# Altium PCB 主板-霍尔BC接地.PcbDoc (part 4 of 6)
Units mm, origin at the board's own origin, x right, y up, seen from the top; angles counter-clockwise.
Board outline 97.69 x 103.45 mm, 2 copper layers (Top Layer, Bottom Layer); 83 components, 83 nets, 266 pads, 295 vias.
Unrouted connection lines stored in the file: 11.
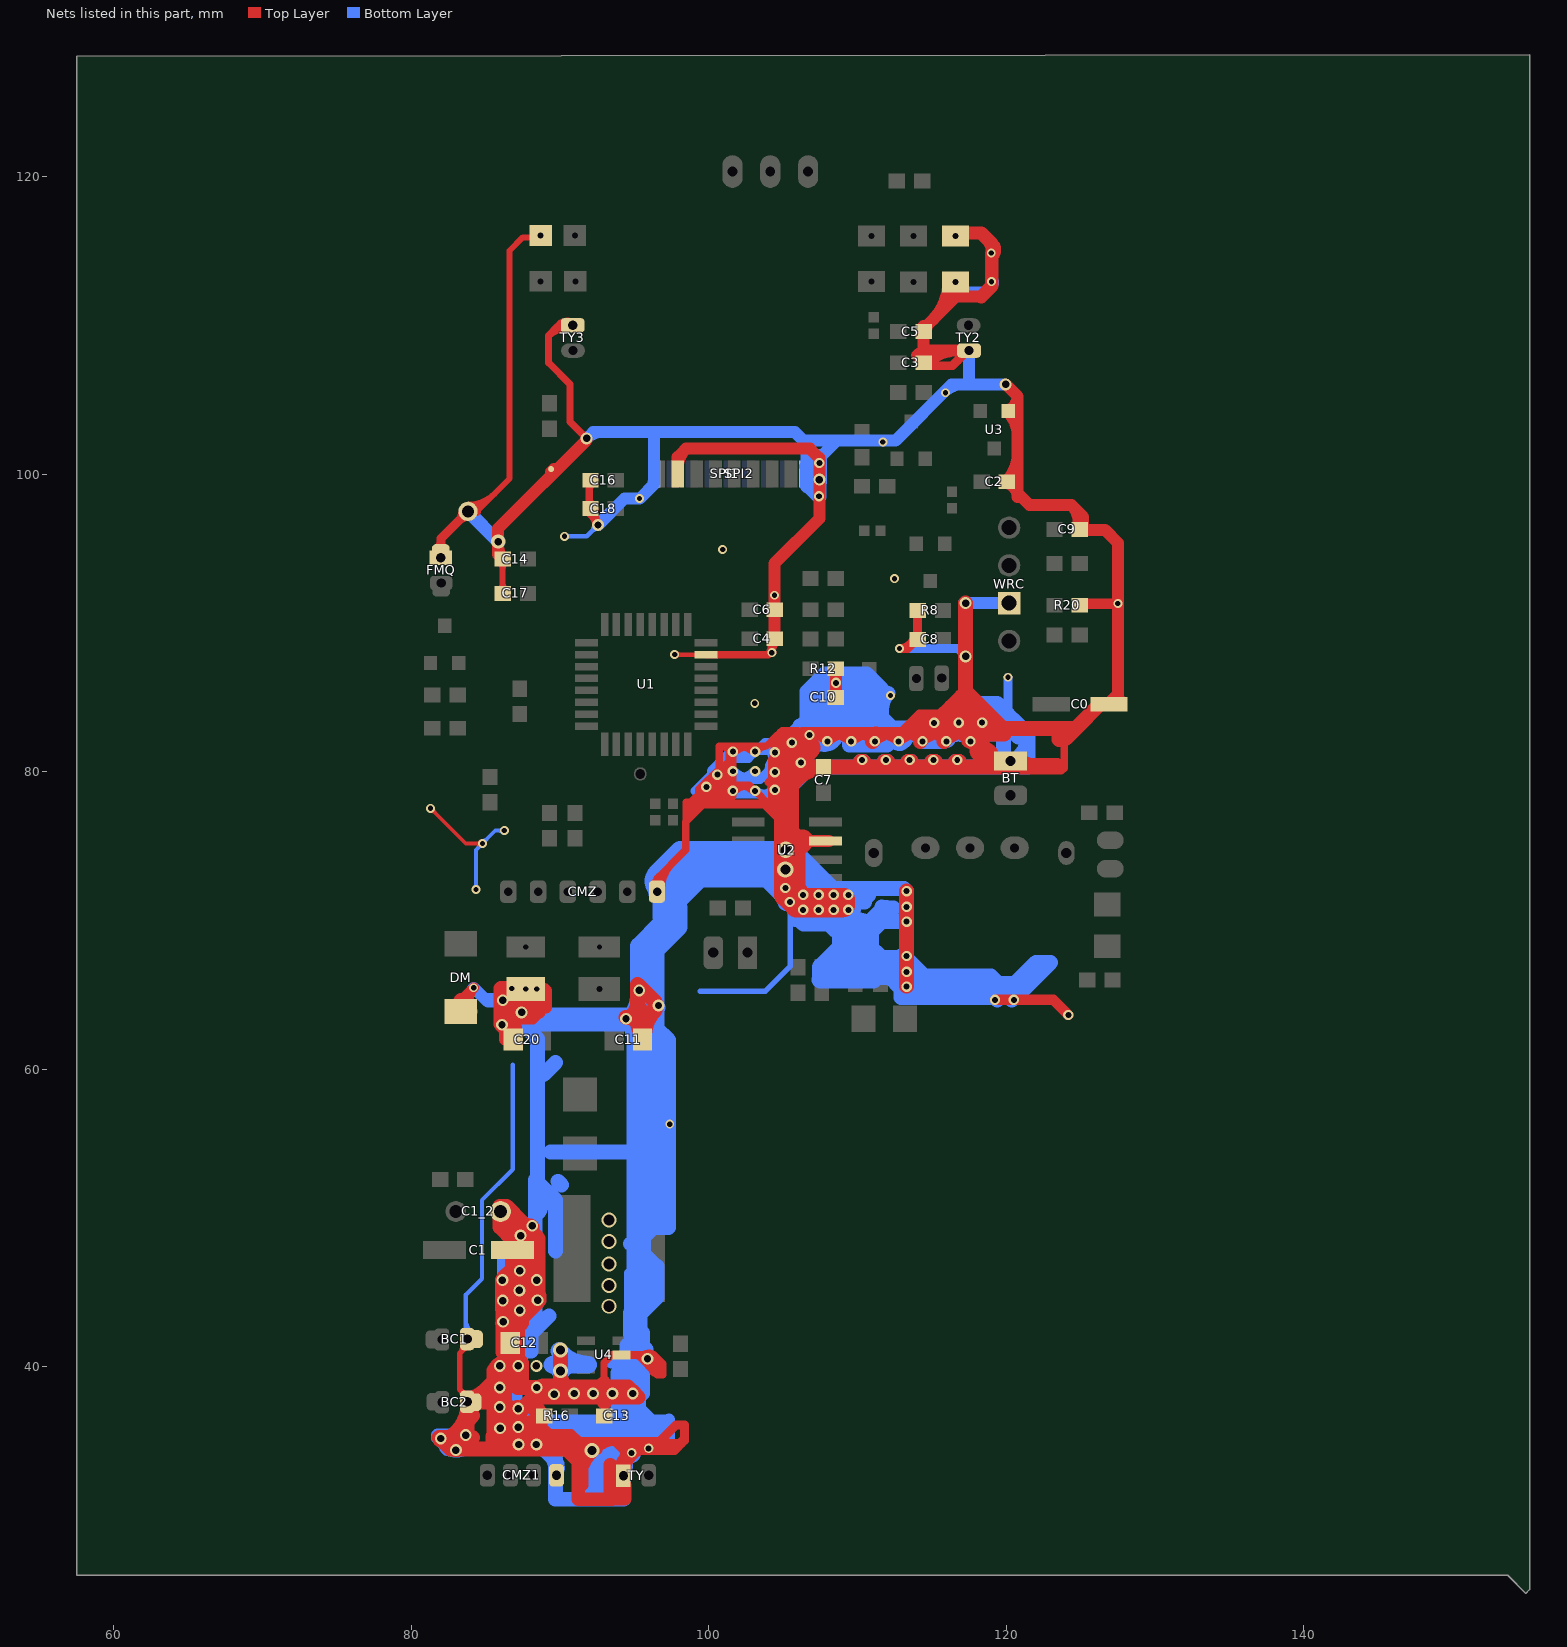
[diagram p4: the nets of this part, all layers, seen from the top]

## Via types
v1: diameter 0.6, hole 0.35, Top Layer to Bottom Layer, 117 vias
v2: diameter 0.7, hole 0.4, Top Layer to Bottom Layer, 104 vias
v3: diameter 0.8, hole 0.5, Top Layer to Bottom Layer, tented both sides, 32 vias
v4: diameter 0.8, hole 0.5, Top Layer to Bottom Layer, 15 vias
v5: diameter 1, hole 0.6, Top Layer to Bottom Layer, tented both sides, 5 vias
v6: diameter 1, hole 0.75, Top Layer to Bottom Layer, tented both sides, 5 vias
v7: diameter 3.4, hole 2.9, Top Layer to Bottom Layer, 4 vias
v8: diameter 0.65, hole 0.4, Top Layer to Bottom Layer, tented both sides, 2 vias
v9: diameter 0.8, hole 0.35, Top Layer to Bottom Layer, 2 vias
v10: diameter 0.7, hole 0.35, Top Layer to Bottom Layer, 2 vias
v11: diameter 1.1, hole 0.68, Top Layer to Bottom Layer, 2 vias
v12: diameter 0.62, hole 0.4, Top Layer to Bottom Layer, 1 vias
v13: diameter 0.95, hole 0.5, Top Layer to Bottom Layer, 1 vias
v14: diameter 0.9, hole 0.5, Top Layer to Bottom Layer, tented both sides, 1 vias
v15: diameter 0.7, hole 0.4, Top Layer to Bottom Layer, tented bottom, 1 vias
v16: diameter 0.8, hole 0.5, Top Layer to Bottom Layer, tented bottom, 1 vias

## Nets (pads, with @x,y where several pads share a name; then routed paths per layer and width w, separated by ;. In a path a pad name is that pad's centre, name@x,y a point inside that pad or via, vN(x,y) a via of type N, cw(c..) or ccw(c..) an arc to the next point about the centre after c; other vN are vias at no path point) (continued)
GND: (continued)
  Top Layer w1: v3@81.938,35.092 ccw(c82.2,35.555) 82.575,35.179 ; v3@81.988,35.079 ccw(c81.988,36.257) 82.82,35.424 ; v3@82.914,34.428 cw(c84.125,33.956) 84.125,35.255 82.652,35.255 ; 83.087,35.691 ccw(c81.405,37.373) pad.0@83.784,37.373 ; v3@83.1,34.429 ccw(c81.988,33.979) v3(81.988,35.179) 82.575,35.179 ; 83.325,35.929 ccw(c81.637,37.617) pad.0@84.025,37.617 ; DM.1@83.34,63.885 DM.1@83.34,64.62 ; v3@83.564,35.408 cw(c85.399,35.408) 84.101,36.705 ; v3@83.695,35.503 ccw(c83.374,34.533) 82.652,35.255 ; pad.0@83.764,37.893 ccw(c83.764,39.429) 84.85,38.343 ; 84.125,36.728 82.652,35.255 ; 84.693,38.186 cw(c85.954,36.926) v3@85.954,38.708 ; 85.398,37.617 cw(c85.398,36.731) v3@86.024,37.358 ; 85.479,34.899 cw(c86.945,34.899) v3@85.908,35.936 ; 85.479,35.07 cw(c86.568,35.07) v3@85.919,35.945 ; 85.547,35.064 cw(c86.78,35.064) v3@85.908,35.936 ; 85.573,35.147 cw(c86.668,35.147) v3@85.91,35.937 ; 85.573,36.605 ccw(c86.719,36.605) v3@85.908,35.794 ; 85.573,36.609 cw(c86.632,36.609) v3@85.883,37.358 ; 85.573,37.93 cw(c86.632,37.93) v3@85.883,38.679 ; 85.573,37.966 ccw(c86.632,37.966) v3@85.883,37.216 ; 85.573,39.286 ccw(c86.632,39.286) v3@85.883,38.537 ; 85.573,39.377 cw(c86.632,39.377) v3@85.883,40.127 ; 85.573,39.568 cw(c86.237,39.568) v3@85.903,40.142 ; 85.649,39.751 v3(85.954,40.056) ; 85.693,39.186 ccw(c84.823,40.056) v3@86.054,40.056 ; v3@85.854,38.608 ccw(c86.839,38.608) 86.142,37.912 ; v3@85.854,38.599 cw(c87.309,38.735) 86.276,39.768 ; v3@85.864,38.653 ccw(c86.533,38.316) 85.884,37.941 ; 85.877,37.694 85.877,37.617 85.877,35.916 85.573,35.611 ; v3@85.919,40.097 ccw(c84.516,41.5) C12.2@86.5,41.5 ; v3@86.003,40.143 cw(c85.708,39.619) 86.309,39.619 ; C1_2.1@86.013,50.242 cw(c86.141,48.321) 87.503,49.682 ; 86.02,39.325 ccw(c85.31,39.734) v3@86.043,40.1 ; v3@86.024,37.216 ccw(c85.417,37.824) 86.276,37.824 ; v3@86.024,38.537 ccw(c85.417,39.144) 86.276,39.144 ; v3@86.024,40.127 cw(c85.417,39.519) 86.276,39.519 ; v3@86.03,64.461 ccw(c89.219,64.461) C20.1@86.964,62.206 ; v3@86.047,63.073 cw(c86.374,62.625) 86.766,63.017 86.958,62.826 ; v3@86.054,37.285 ccw(c84.411,37.319) 85.573,38.481 ; v3@86.081,37.49 86.081,37.032 86.081,35.966 v3(85.979,35.865) 85.573,35.458 ; v3@86.086,63.09 cw(c86.275,62.143) 86.958,62.826 ; v3@86.12,63.091 cw(c85.981,62.124) C20.1@86.958,62.124 ; v3@86.123,63.091 cw(c86.023,62.502) 86.509,62.847 ; v3(86.131,45.822) 86.144,44.45 86.156,43.027 v3@86.157,42.977 ; 86.134,49.223 ccw(c87.351,50.44) v3@87.351,48.719 ; v3@86.138,63.087 cw(c85.753,61.945) C20.1@86.958,61.945 ; C12.2@86.157,40.996 v3@86.157,42.697 ; C12.2@86.157,41.147 ccw(c86.399,41.147) C12.2@86.299,40.926 ; v3@86.156,44.55 cw(c86.166,43.035) v3@87.237,44.106 ; v3@86.177,62.921 ccw(c84.753,64.345) 86.766,64.345 ; v3@86.181,44.547 cw(c86.043,43.993) 86.614,43.993 ; v3@86.191,62.939 ccw(c85.667,63.268) 86.27,63.405 ; C1_2.1@86.195,50.398 ccw(c86.978,50.224) 86.411,49.657 87.342,48.726 cw(c86.738,48.121) C1.1@87.554,47.869 ; C1_2.1@86.198,50.411 ccw(c88.318,50.075) 86.8,48.557 85.95,49.407 85.95,50.775 86.411,50.775 87.503,49.682 ; v3@86.199,45.748 ccw(c84.465,47.625) C1.1@87.02,47.625 ; C1_2.1@86.2,50.442 ccw(c87.586,50.442) 86.606,49.462 ; v3@86.202,45.892 cw(c85.208,44.898) 86.614,44.898 ; v3@86.208,43.282 86.208,45.974 86.8,46.566 C1.1@86.8,47.84 C1.1@86.8,48.26 ; v3@86.228,44.379 ccw(c85.294,45.312) 86.614,45.312 ; v3@86.228,64.714 cw(c84.927,63.413) 86.766,63.413 ; v3@86.276,40.234 cw(c87.916,40.234) 86.756,41.394 ccw(c87.835,40.315) 86.309,40.315 ; 86.276,40.592 cw(c85.417,40.592) 86.024,39.985 ccw(c85.337,40.673) 86.309,40.673 ; C12.2@86.276,41.437 86.276,40.454 ; C12.2@86.284,40.97 v3@86.284,42.824 ; v3@86.284,42.946 ccw(c87.896,42.946) C12.2@86.756,41.806 ; v3@86.284,43.078 v3@86.284,42.824 ; C12.2@86.309,41.529 86.309,40.488 ; v3@86.311,62.763 86.03,63.044 86.03,65.43 v10(86.766,65.43) ; 86.313,40.372 cw(c85.672,40.544) v3@86.004,39.969 ; v3@86.347,39.995 ccw(c86.814,40.503) v3@87.263,39.98 ; 86.36,35.331 86.397,35.369 ; 86.385,44.958 86.614,44.729 ; v3@86.411,42.951 v3@86.284,42.824 ; 86.43,46.196 cw(c87.3,45.326) v3@87.3,46.557 ; 86.431,63.754 86.766,63.419 86.766,65.406 87.6,65.406 pad.0@87.6,65.432 ; C12.2@86.579,41.368 cw(c86.066,40.417) v3@87.146,40.417 ; C12.2@86.593,41.839 ccw(c86.256,42.662) 87.146,42.662 ; 86.614,44.184 cw(c87.803,44.184) v3@87.226,45.223 ; 86.614,44.45 86.614,44.729 ; 86.614,45.139 ccw(c85.714,45.139) 86.184,45.907 cw(c85.269,44.413) 87.02,44.413 ; 86.614,45.339 86.614,44.729 ; 86.647,43.96 ccw(c87.3,44.613) 87.3,43.69 ccw(c87.3,45.021) 88.241,44.08 ; 86.689,36.423 86.919,36.652 ; 86.729,34.468 ccw(c86.729,35.267) v3@87.294,34.702 ; C1.1@86.729,47.769 cw(c86.026,47.066) 87.02,47.066 ; C12.2@86.739,41.821 cw(c87.596,42.977) v3@86.157,42.977 ; 86.766,63.052 cw(c87.687,63.052) v3@87.395,63.925 ; 86.766,63.629 cw(c88.971,63.629) pad.0@87.412,65.188 ; pad.0@86.766,65.183 ccw(c88.78,65.183) v3@87.356,63.759 ; C12.2@86.799,41.487 ccw(c87.993,41.385) 87.146,40.538 ; C12.2@86.8,41.5 ccw(c88.288,41.5) v3@87.236,40.448 ; C12.2@86.8,41.7 cw(c88.288,41.7) 87.236,42.752 ; C12.2@86.799,41.713 cw(c87.993,41.815) 87.146,42.662 ; C1.1@86.8,47.422 ccw(c88.265,47.422) 87.229,46.386 cw(c87.733,46.89) 87.02,46.89 ; C1.1@86.8,47.731 cw(c88.439,47.731) v3@87.28,48.89 ; C1.1@86.8,48.034 cw(c87.808,48.034) v3@87.3,48.905 ; 86.803,50.383 cw(c85.239,48.819) v3@87.451,48.819 ; C12.2@86.868,41.046 86.309,40.488 ; 86.936,34.468 85.581,34.468 ; 86.944,39.446 86.944,39.441 ; C20.1@86.958,62 86.958,62.383 86.958,62.826 ; C12.2@86.972,40.913 ccw(c86.866,41.173) C12.2@87.146,41.173 ; v3@86.982,36.055 86.276,36.762 86.276,36.836 v3@86.276,37.295 ; pad.0@86.988,65.188 cw(c85.928,64.128) v3@87.427,64.128 ; 87.02,44.764 cw(c87.646,44.764) v3@87.204,45.207 ; 87.02,45.508 ccw(c87.646,45.508) v3@87.204,45.065 ; 87.02,46.023 cw(c87.733,46.023) v3@87.229,46.527 ; C12.2@87.054,42.248 cw(c86.97,42.093) C12.2@87.146,42.093 ; v3@87.101,40.077 ccw(c88.284,39.815) 87.427,38.959 ; v3@87.102,37.211 ccw(c88.123,36.942) v3@87.376,36.195 ; 87.105,35.247 87.165,35.247 ; v3@87.12,36.003 ccw(c87.568,35.65) 87.165,35.247 ; v3@87.184,34.864 cw(c87.467,34.216) 87.82,34.828 ; v3@87.199,45.201 ccw(c87.805,44.674) v3@87.237,44.106 ; v3@87.2,43.798 ccw(c87.98,43.734) 87.427,43.18 ; v3@87.224,34.468 88.036,34.468 ; v3@87.224,34.873 cw(c87.224,34.11) 87.763,34.649 ; 87.223,36.46 cw(c86.601,36.101) v3@87.295,35.915 ; v3@87.234,37.092 cw(c86.911,37.93) v3@86.276,37.295 ; v3@87.251,48.832 ccw(c88.129,48.716) C1.1@87.503,48.09 ; v3@87.252,48.833 ccw(c88.103,48.707) C1.1@87.494,48.099 ; v3@87.26,35.152 ccw(c88.417,36.31) v3@88.417,34.673 ; v3@87.274,45.236 cw(c87.274,44.272) 87.956,44.954 ; v3@87.288,35.985 cw(c86.71,35.702) 87.165,35.247 ; v3@87.319,48.914 cw(c87.692,47.781) 88.536,48.624 ; v3@87.345,45.207 cw(c86.537,44.398) 87.68,44.398 ; v3@87.37,45.106 cw(c86.294,45.439) v3@86.294,44.313 ; v3@87.371,43.86 ccw(c86.294,42.806) v3@86.294,44.313 ; v3@87.374,43.97 v3@87.237,44.106 ; v3@87.393,43.826 cw(c86.743,43.569) 87.237,43.075 ; v3@87.393,43.825 cw(c86.374,43.434) 87.146,42.662 ; v3(87.427,63.83) pad.0@87.427,65.329 ; v3@87.45,48.829 cw(c85.965,48.68) C1.1@87.02,47.625 ; C1.1@87.503,47.244 cw(c88.246,47.244) C1.1@87.721,47.769 ; C1.1@87.503,48.436 ccw(c88.246,48.436) C1.1@87.721,47.911 ; v3@87.542,34.87 cw(c88.612,35.941) 87.098,35.941 cw(c89.248,35.941) 87.728,37.461 ; C1.1@87.579,47.769 cw(c85.27,45.46) v3@88.536,45.46 ; C1.1@87.585,47.916 ccw(c86.762,48.889) 88.036,48.889 88.036,48.641 ; C1.1@87.604,47.929 ccw(c87.234,48.641) 88.036,48.641 ; pad.0@87.612,65.41 87.617,65.406 pad.0@87.661,65.361 ; 87.68,44.856 cw(c88.815,44.856) v3@88.407,45.915 ; 87.68,44.932 cw(c88.709,44.932) v3@88.414,45.917 ; 87.744,35.827 87.49,35.573 87.427,35.509 ; 87.744,37.477 cw(c89.611,35.61) v3@89.611,38.251 ; C1.1@87.75,47.849 cw(c88.739,47.939) 88.036,48.641 ; 87.923,34.468 ccw(c87.923,35.267) v3@88.488,34.702 ; v3@88.038,49.479 ccw(c88.9,49.479) 88.291,48.869 ; v3@88.062,45.745 87.68,45.364 87.68,45.229 ; 88.308,38.042 ccw(c87.742,38.608) v3@88.543,38.608 ; v3@88.347,34.702 ccw(c88.912,35.267) 88.912,34.468 ; v3@88.348,45.855 ccw(c89.095,45.593) 88.536,45.034 ; v3@88.49,44.375 cw(c88.517,45.212) 87.68,45.212 ; v3@88.524,44.571 ccw(c88.217,43.609) 87.503,44.323 ; v3@88.536,45.785 cw(c87.697,46.112) 87.697,45.212 ; v3@88.555,44.554 ccw(c88.148,44.032) 87.68,44.5 ; v3@88.592,44.457 ccw(c87.758,44.612) 88.358,45.212 ; v3@88.591,44.497 ccw(c87.697,44.296) 87.697,45.212 ; 88.67,36.195 87.774,36.195 ; v3@88.749,38.608 cw(c88.749,37.288) v3@89.682,38.222 ; 88.91,38.643 88.875,38.608 ; 89.205,34.569 89.399,34.569 89.687,34.569 89.738,34.569 89.764,34.595 89.84,34.671 ; v3@89.69,38.213 ccw(c88.875,37.57) 88.875,38.608 ; v3@89.703,38.191 ccw(c89,37.881) 89,38.649 89.611,38.649 89.762,38.649 89.764,38.649 90.957,38.649 92.227,38.65 92.371,38.65 92.535,38.65 ; 89.764,38.647 90.957,38.647 ; 90.037,34.868 90.037,34.804 90.149,34.692 90.17,34.671 ; 90.043,39.1 v5(90.043,39.729) v5(90.043,41.123) ; 90.123,38.647 cw(c90.123,37.368) v4@91.028,38.272 ; 90.568,38.647 ccw(c90.568,37.194) v3@89.54,38.222 ; v4@90.885,38.27 cw(c91.757,37.45) 91.757,38.647 ; 91.288,34.468 90.373,34.468 90.149,34.468 90.043,34.468 89.789,34.468 89.306,34.468 88.036,34.468 ; 91.394,38.647 cw(c91.394,37.368) v4@92.298,38.272 ; v4@91.992,38.412 91.757,38.647 ; v4@92.323,38.232 ccw(c91.757,38.053) 91.757,38.647 ; 92.681,38.65 cw(c92.682,37.36) 93.593,38.272 ccw(c92.682,37.36) 92.682,38.65 ; 92.989,37.614 cw(c93.705,37.614) v4@93.493,38.297 ; v4@93.452,38.131 ccw(c93.879,38.558) 93.879,37.954 ; v4@93.507,38.103 cw(c93.604,38.71) 92.989,38.71 92.989,38.65 ; 94.052,38.65 cw(c94.052,37.359) 94.965,38.272 ccw(c94.053,37.36) 94.053,38.65 ; 94.362,38.65 ccw(c94.362,37.367) 93.452,38.272 cw(c94.362,37.367) 94.362,38.65 ; 94.538,37.954 ccw(c94.538,38.558) v4@94.965,38.131 ; 95.098,64.033 95.225,64.033 ; 95.225,63.248 ccw(c96.698,63.248) 95.656,62.206 cw(c96.207,62.757) 95.428,62.757 ; C11.2@95.402,62.125 ccw(c93.966,62.369) 94.996,63.398 95.225,63.17 ; C11.2@95.428,62.222 95.428,62.967 ; 95.431,64.033 95.225,64.033 ; C11.2@95.44,62.202 ccw(c95.039,62.578) 95.428,62.967 ; C11.2@95.651,62.211 cw(c96.516,63.17) 95.225,63.17 ; C11.2@95.7,62.11 cw(c98.08,62.27) 96.393,63.957 ; v16(95.885,40.538) 96.444,39.98 96.444,40.081 v16@95.961,40.564 ; v16@95.927,40.629 cw(c95.546,39.816) 96.444,39.816 ; v3@96.393,64.165 96.393,63.957 ; 105.588,76.124 105.588,79.121 106.782,80.315 BT.2@121.218,80.315 ; 105.825,79.358 ccw(c104.563,80.62) v2@106.347,80.62 ; 106.005,79.539 cw(c107.723,77.821) C7.1@107.723,80.25 ; 108.941,70.968 v2@109.271,70.968 ; 109.509,80.315 ccw(c109.509,81.6) v2@110.418,80.691 ; v2@110.206,80.691 ccw(c111.115,81.6) 111.115,80.315 ; v2@110.96,82.245 111.239,82.525 111.252,82.537 ; 111.109,80.315 ccw(c111.109,81.6) v2@112.018,80.691 ; v2@111.806,80.691 ccw(c112.715,81.6) 112.715,80.315 ; 112.709,80.315 ccw(c112.709,81.6) v2@113.618,80.691 ; v2@113.309,65.583 v2(113.309,66.548) v2(113.309,67.615) v2(113.309,69.926) v2(113.309,70.917) v2(113.309,71.984) ; v2@113.406,80.691 ccw(c114.315,81.6) 114.315,80.315 ; 114.309,80.315 ccw(c114.309,81.6) v2@115.218,80.691 ; 114.592,82.537 114.833,82.779 ; 114.706,82.779 115.646,83.718 116.279,84.351 116.98,85.052 117.17,84.861 117.17,84.684 ; v2@115.006,80.691 ccw(c115.915,81.6) 115.915,80.315 ; v2@115.1,83.151 ccw(c115.524,84.06) 115.867,83.117 ; v2@115.164,83.137 ccw(c115.164,84.246) 115.948,83.462 ; 115.265,82.779 116.205,83.718 116.838,84.351 ; 115.336,82.85 cw(c116.815,81.371) v2@116.815,83.462 ; 115.909,80.315 ccw(c115.909,81.6) v2@116.818,80.691 ; 116.027,82.525 116.04,82.537 116.218,82.715 v2(116.815,83.312) ; v2@116.606,80.691 ccw(c117.515,81.6) 117.515,80.315 ; v2@116.665,83.302 ccw(c117.17,83.336) 117.17,82.829 ; v2@116.684,83.239 cw(c117.496,83.693) 116.838,84.351 ; v2@116.709,83.206 ccw(c117.618,84.115) 117.618,82.829 ; v2@116.921,83.206 ccw(c116.318,83.808) 117.17,83.808 ; v2@116.921,83.418 cw(c116.318,82.816) 117.17,82.816 ; v4(117.272,91.338) 117.272,85.42 119.786,82.906 ; v2@117.468,82.11 cw(c118.643,81.51) 118.643,82.829 ; 117.586,82.829 ccw(c117.586,84.115) v2@118.495,83.206 ; v2(117.602,82.042) 118.059,82.499 ; 117.945,84.747 cw(c116.51,83.312) v2@118.539,83.312 ; v2@118.282,83.207 ccw(c119.875,84.767) 119.875,82.537 118.681,82.537 ; v2@118.285,83.205 cw(c119.457,84.404) 117.78,84.404 ; v2@118.385,83.462 cw(c118.441,81.561) 119.786,82.906 ; v2@118.495,83.418 cw(c118.138,83.061) 118.643,83.061 ; 118.497,80.315 ccw(c118.497,82.074) BT.2@119.741,80.83 ; 123.546,82.169 123.546,82.906 ; 124.003,82.245 124.663,82.906 ; 124.003,82.525 124.231,82.525 ; C0.2@126.303,84.546 124.663,82.906 ; 82.575,35.179 82.652,35.255 ; 82.652,35.255 cw(c82.162,35.744) 81.958,35.083 ccw(c82.162,35.744) 82.652,35.255 ; 82.652,35.255 81.864,35.255 82.652,34.468 85.479,34.468 ; 85.479,34.468 85.479,35.247 85.547,35.247 ; 85.479,34.468 85.547,34.468 ; 85.547,34.468 85.581,34.468 ; 85.547,34.468 85.547,35.247 ; 85.547,35.247 85.573,35.273 85.573,35.408 ; 85.547,35.247 85.581,35.247 85.581,34.468 ; 85.547,35.247 85.547,35.433 ; 85.547,35.433 85.573,35.408 ; 85.547,35.433 85.573,35.458 ; 85.573,35.408 85.573,35.458 ; 85.573,35.458 85.573,35.611 ; 85.573,35.611 85.573,37.617 ; 85.573,37.617 85.573,38.481 ; 85.573,37.617 pad.0@84.125,37.617 85.573,39.065 ; 85.573,38.481 86.276,37.778 ; 85.573,38.481 85.573,39.065 ; 85.573,39.065 ccw(c86.185,39.065) 85.908,38.519 cw(c86.185,39.065) 85.573,39.065 ; 85.573,39.065 86.276,39.768 ; 85.573,39.065 85.573,39.751 86.276,40.454 ; v3@85.908,35.936 ccw(c86.699,35.144) 85.581,35.144 cw(c86.699,35.144) v3@85.908,35.936 ; v3@85.919,35.945 ccw(c86.436,35.253) 85.573,35.253 cw(c86.436,35.253) v3@85.919,35.945 ; v3@86.004,39.969 ccw(c85.704,40.488) 86.283,40.333 ; v3@86.004,39.969 ccw(c85.704,40.488) 86.283,40.333 ; v3@86.004,39.969 ccw(c85.653,40.577) 86.331,40.396 cw(c85.653,40.577) v3@86.004,39.969 ; v3@86.004,39.969 ccw(c85.704,40.488) 86.283,40.333 ; v3@86.004,39.969 ccw(c85.704,40.488) 86.283,40.333 ; v3@86.024,37.358 cw(c85.417,36.751) 86.276,36.751 ; v3@86.024,37.358 cw(c85.417,36.751) 86.276,36.751 ; v3@86.024,37.358 cw(c85.417,36.751) 86.276,36.751 ; v3@86.024,38.679 cw(c85.417,38.072) 86.276,38.072 ; v3@86.024,38.679 cw(c85.417,38.072) 86.276,38.072 ; v3@86.024,38.679 cw(c85.417,38.072) 86.276,38.072 ; v3@86.157,42.697 ccw(c87.102,42.697) 86.712,41.837 cw(c87.102,42.697) v3@86.157,42.697 ; v3@86.157,42.697 v3@86.284,42.824 ; v3@86.157,42.697 v3@86.157,42.977 ; v3@86.276,37.295 86.919,36.652 ; v3@86.276,37.295 86.276,37.617 86.276,37.778 ; 86.276,37.778 cw(c85.523,37.778) 86.02,37.212 ccw(c85.523,37.778) 86.276,37.778 ; 86.276,37.778 86.276,39.768 ; 86.276,39.768 86.309,39.802 v3@86.309,40.03 ; 86.276,39.768 86.276,40.454 ; 86.276,40.454 ccw(c85.591,41.139) 86.508,41.452 cw(c85.591,41.139) 86.276,40.454 ; 86.276,40.454 86.309,40.488 ; v3@86.284,42.824 ccw(c87.616,42.824) 86.748,41.814 cw(c87.616,42.824) v3@86.284,42.824 ; v3@86.294,44.313 87.031,44.313 ; v3@86.294,44.313 87.237,43.37 ; v3@86.309,40.03 86.309,40.488 ; v3@86.309,40.03 86.778,39.599 86.88,39.505 86.944,39.441 ; 86.309,40.488 cw(c85.717,40.488) 86.002,39.968 ccw(c85.717,40.488) 86.309,40.488 ; 86.309,40.488 ccw(c85.676,41.12) 86.51,41.446 cw(c85.676,41.12) 86.309,40.488 ; 86.614,44.729 87.031,44.313 ; 86.919,36.652 88.875,38.608 ; 86.919,36.652 87.148,36.423 ; 86.944,39.441 87.427,38.958 ; 86.944,39.441 86.944,38.799 87.136,38.608 87.681,38.608 v3(88.443,38.608) 88.875,38.608 ; 86.944,39.684 cw(c87.57,39.684) v3@87.127,40.127 ; 86.944,39.684 cw(c87.57,39.684) v3@87.127,40.127 ; 86.944,39.684 cw(c87.57,39.684) v3@87.127,40.127 ; 86.944,39.684 cw(c87.57,39.684) v3@87.127,40.127 ; C1.1@87.02,47.625 87.02,44.729 v3@87.237,44.946 ; C1.1@87.02,47.625 C1.1@87.494,48.099 ; 87.031,44.313 ccw(c86.382,43.664) 86.129,44.546 cw(c86.382,43.664) 87.031,44.313 ; 87.031,44.313 87.237,44.313 ; 87.031,44.313 v3@87.237,44.106 ; 87.064,36.507 cw(c86.497,35.941) v3@87.298,35.941 ; 87.064,36.507 cw(c86.497,35.941) v3@87.298,35.941 ; 87.064,36.507 cw(c86.497,35.941) v3@87.298,35.941 ; v3@87.124,34.773 cw(c88.17,34.773) 87.43,35.512 ; v3@87.124,34.773 cw(c88.17,34.773) 87.43,35.512 ; v3@87.124,34.772 cw(c88.159,34.777) 87.427,35.509 ; v3@87.124,34.773 cw(c88.17,34.773) 87.43,35.512 ; v3@87.124,34.772 cw(c88.159,34.777) 87.427,35.509 ; v3@87.127,36.012 cw(c87.57,35.569) 87.57,36.195 ; v3@87.127,36.012 cw(c87.57,35.569) 87.57,36.195 ; v3@87.127,36.012 cw(c87.57,35.569) 87.57,36.195 ; 87.146,40.538 87.146,42.662 ; 87.146,40.538 87.427,40.257 87.427,38.958 ; 87.146,42.662 87.427,42.943 87.427,43.18 ; 87.148,36.423 cw(c87.576,36.851) 87.123,37.252 ccw(c87.576,36.851) 87.148,36.423 ; 87.148,36.423 v3@87.376,36.195 ; v3@87.153,34.702 ccw(c87.718,35.267) 87.718,34.468 ; v3@87.153,34.702 ccw(c87.718,35.267) 87.718,34.468 ; v3@87.153,34.702 ccw(c87.718,35.267) 87.718,34.468 ; 87.165,35.247 87.741,34.671 ; 87.165,35.247 87.427,35.509 ; 87.237,43.075 87.384,43.222 ; 87.237,43.075 87.237,43.37 ; 87.237,43.37 87.384,43.222 ; 87.237,43.37 v3@87.237,44.106 ; v3@87.237,44.106 87.237,44.313 ; 87.237,44.313 87.493,44.313 87.503,44.323 ; 87.237,44.313 v3@87.237,44.946 ; v3@87.237,44.946 v3@87.503,45.212 ; v3@87.376,36.195 87.774,36.195 ; 87.384,43.223 cw(c87.851,43.69) 87.201,43.807 ccw(c87.851,43.69) 87.384,43.223 ; 87.384,43.222 87.427,43.18 ; 87.384,43.222 v3@88.536,44.374 ; C1.1@87.494,48.099 C1.1@87.503,48.09 ; C1.1@87.494,48.099 C1.1@87.503,48.108 ; 87.503,44.323 v3@87.503,45.212 ; 87.503,44.323 87.68,44.5 ; v3@87.503,45.212 87.68,45.212 ; v3@87.503,45.212 v3@87.6,45.309 ; C1.1@87.503,48.09 87.503,45.406 v3@87.6,45.309 ; C1.1@87.503,48.09 C1.1@87.503,48.108 ; C1.1@87.503,48.108 87.503,49.682 ; C1.1@87.503,48.108 88.036,48.641 ; 87.503,49.682 88.036,49.149 88.036,49.124 88.536,48.624 ; 87.572,49.614 ccw(c88.138,50.18) v3@88.138,49.379 ; 87.572,49.614 ccw(c88.138,50.18) v3@88.138,49.379 ; 87.572,49.614 ccw(c88.138,50.18) v3@88.138,49.379 ; pad.0@87.6,65.432 87.617,65.431 87.701,65.43 87.845,65.427 pad.0@87.723,65.305 ; pad.0@87.6,65.432 87.617,65.415 87.665,65.366 pad.0@87.723,65.305 ; pad.0@87.6,65.432 87.602,65.406 87.603,65.393 87.606,65.345 87.617,65.199 pad.0@87.72,65.302 ; v3@87.6,45.309 87.68,45.229 ; pad.0@87.661,65.361 ccw(c88.142,65.842) 88.528,65.281 cw(c88.142,65.842) pad.0@87.661,65.361 ; pad.0@87.661,65.361 pad.0@87.72,65.302 ; 87.68,44.5 87.68,45.212 ; 87.68,45.212 87.697,45.212 ; 87.68,45.212 87.68,45.229 ; 87.68,45.229 87.697,45.212 ; 87.697,45.212 v3@88.536,44.374 ; 87.697,45.212 88.358,45.212 ; pad.0@87.72,65.302 ccw(c88.136,65.718) 88.548,65.298 cw(c88.136,65.718) pad.0@87.72,65.302 ; pad.0@87.72,65.302 87.96,65.062 pad.0@87.723,65.305 ; pad.0@87.72,65.302 pad.0@87.723,65.305 ; 87.741,34.671 ccw(c87.253,34.183) 87.219,34.872 cw(c87.253,34.183) 87.741,34.671 ; 87.741,34.671 87.863,34.549 88.117,34.549 88.036,34.468 ; 87.774,36.195 ccw(c87.774,37.704) R16.2@88.9,36.7 ; 88.358,45.212 88.536,45.034 ; v3@88.536,44.374 88.536,45.034 ; 88.536,45.034 88.536,48.624 ; R16.2@88.9,36.7 cw(c88.928,37.311) 88.316,37.311 88.316,37.854 ccw(c89.748,37.854) R16.2@88.9,36.7 ; v3@89.54,38.221 cw(c90.573,37.189) 90.573,38.649 ccw(c90.573,37.189) v3@89.54,38.221 ; v4@90.861,38.227 cw(c91.406,38.084) 91.406,38.647 ; v4@90.861,38.227 cw(c91.406,38.084) 91.406,38.647 ; v4@90.861,38.227 cw(c91.406,38.084) 91.406,38.647 ; v4@90.861,38.227 cw(c91.406,38.084) 91.406,38.647 ; v4@90.887,38.272 cw(c91.797,37.362) 91.797,38.65 ccw(c91.797,37.362) v4@90.887,38.272 ; v4@90.887,38.272 cw(c91.791,37.368) 91.791,38.647 ccw(c91.791,37.368) v4@90.887,38.272 ; 90.957,38.647 91.406,38.647 ; 90.957,38.647 91.406,38.647 ; 90.957,38.647 91.757,38.647 ; 91.406,38.647 cw(c91.406,37.397) 92.299,38.272 ccw(c91.406,37.397) 91.406,38.647 ; 91.406,38.647 92.227,38.647 ; 91.406,38.647 92.227,38.647 ; v4@92.131,38.226 cw(c92.676,38.087) 92.676,38.65 ; v4@92.131,38.226 cw(c92.676,38.087) 92.676,38.65 ; v4@92.131,38.226 cw(c92.676,38.087) 92.676,38.65 ; v4@92.131,38.226 cw(c92.676,38.087) 92.676,38.65 ; v4@92.15,38.265 cw(c92.964,37.597) 92.964,38.65 ; v4@92.15,38.265 cw(c92.964,37.597) 92.964,38.65 ; v4@92.15,38.265 cw(c92.964,37.597) 92.964,38.65 ; v4@92.15,38.265 cw(c92.964,37.597) 92.964,38.65 ; v4@92.152,38.267 cw(c92.989,37.543) 92.989,38.65 ; v4@92.152,38.267 cw(c92.989,37.543) 92.989,38.65 ; v4@92.152,38.267 cw(c92.99,37.542) 92.989,38.65 ; v4@92.152,38.267 cw(c92.99,37.542) 92.989,38.65 ; v4@92.157,38.131 ccw(c92.584,38.558) 92.584,37.954 ; v4@92.157,38.131 ccw(c92.584,38.558) 92.584,37.954 ; v4@92.157,38.131 ccw(c92.584,38.558) 92.584,37.954 ; 92.227,38.647 92.532,38.647 92.535,38.65 ; 92.535,38.65 92.676,38.65 ; 92.535,38.65 92.676,38.65 ; 92.676,38.65 92.964,38.65 ; 92.676,38.65 92.674,38.648 v4(92.227,38.202) 92.475,37.954 92.989,37.954 ; 92.676,38.65 92.964,38.65 ; 92.964,38.65 cw(c92.964,37.928) v4@93.613,38.246 ; 92.964,38.65 cw(c92.964,37.928) v4@93.613,38.246 ; 92.964,38.65 cw(c92.964,37.928) v4@93.613,38.246 ; 92.964,38.65 cw(c92.964,37.928) v4@93.613,38.246 ; 92.964,38.65 92.989,38.65 ; 92.964,38.65 92.989,38.65 ; 92.989,37.954 92.989,38.648 ; 92.989,37.954 93.428,37.954 95.261,37.954 94.894,38.32 94.564,38.65 ; 92.989,38.648 ccw(c93.536,38.648) 93.52,38.102 cw(c93.536,38.648) 92.989,38.648 ; 92.989,38.648 92.989,38.65 ; 92.989,38.65 cw(c92.989,37.968) v4@93.614,38.242 ; 92.989,38.65 cw(c92.989,37.968) v4@93.614,38.242 ; 92.989,38.65 cw(c92.989,37.968) v4@93.614,38.242 ; 92.989,38.65 ccw(c93.538,38.65) 93.519,38.102 cw(c93.538,38.65) 92.989,38.65 ; 92.989,38.65 cw(c92.989,37.968) v4@93.614,38.242 ; 92.989,38.65 93.074,38.65 ; 92.989,38.65 93.523,38.65 ; 93.074,38.65 cw(c93.074,38.087) 93.62,38.226 ccw(c93.074,38.087) 93.074,38.65 ; 93.074,38.65 93.076,38.648 v4(93.523,38.202) 93.675,38.202 v4(94.894,38.202) 94.446,38.65 ; 93.074,38.65 93.523,38.65 ; 93.167,37.954 ccw(c93.167,38.558) v4@93.594,38.131 ; 93.167,37.954 ccw(c93.167,38.558) v4@93.594,38.131 ; 93.167,37.954 ccw(c93.167,38.558) v4@93.594,38.131 ; v4@93.436,38.251 cw(c94.124,37.858) 94.124,38.65 ; v4@93.436,38.251 cw(c94.124,37.858) 94.124,38.65 ; v4@93.436,38.251 cw(c94.124,37.858) 94.124,38.65 ; v4@93.436,38.251 cw(c94.124,37.858) 94.124,38.65 ; 93.523,38.65 94.124,38.65 ; 93.523,38.65 94.124,38.65 ; 94.124,38.65 cw(c94.124,37.523) v4@94.969,38.268 ; 94.124,38.65 cw(c94.124,37.525) v4@94.97,38.268 ; 94.124,38.65 cw(c94.124,37.525) v4@94.97,38.268 ; 94.124,38.65 cw(c94.124,37.525) v4@94.97,38.268 ; 94.124,38.65 94.362,38.65 ; 94.124,38.65 94.362,38.65 ; 94.362,38.65 94.446,38.65 ; 94.362,38.65 94.564,38.65 ; v3@94.442,63.498 cw(c94.442,62.402) 95.217,63.177 ; v3@94.442,63.498 cw(c94.442,62.402) 95.217,63.177 ; v3@94.442,63.498 cw(c94.442,62.402) 95.217,63.177 ; 94.446,38.65 94.564,38.65 ; 95.225,63.17 cw(c94.583,62.528) 95.413,62.161 ccw(c94.583,62.528) 95.225,63.17 ; 95.225,63.17 95.428,62.967 ; 95.225,63.17 95.225,64.033 ; 95.225,63.17 95.606,63.17 96.393,63.957 ; 95.225,64.033 95.225,65.71 96.393,64.541 96.393,63.957 ; 105.308,79.198 ccw(c105.308,80.058) 105.917,79.45 ; 105.308,79.198 ccw(c105.308,80.058) 105.917,79.45 ; 105.308,79.198 ccw(c105.308,80.058) 105.917,79.45 ; 105.321,79.2 ccw(c105.061,80.171) 105.932,79.668 ; 105.321,79.2 ccw(c105.061,80.171) 105.932,79.668 ; 105.321,79.2 ccw(c105.061,80.171) 105.932,79.668 ; 105.321,79.2 ccw(c105.061,80.171) 105.932,79.668 ; 105.321,79.2 ccw(c105.061,80.171) 105.932,79.668 ; 105.321,79.2 ccw(c105.061,80.171) 105.932,79.668 ; 105.344,79.283 cw(c104.755,78.694) 105.588,78.694 ; 105.344,79.283 cw(c104.755,78.694) 105.588,78.694 ; 105.344,79.283 cw(c104.755,78.694) 105.588,78.694 ; v2@111.025,82.042 cw(c111.673,82.042) 111.215,82.5 ; v2@111.025,82.042 cw(c111.673,82.042) 111.215,82.5 ; v2@111.025,82.042 cw(c111.673,82.042) 111.215,82.5 ; v2@115.825,82.042 cw(c116.503,82.042) 116.024,82.521 ; v2@115.825,82.042 cw(c116.503,82.042) 116.024,82.521 ; v2@115.825,82.042 cw(c116.503,82.042) 116.024,82.521 ; v2@115.825,82.042 cw(c116.503,82.042) 116.024,82.521 ; v2@115.825,82.042 cw(c116.503,82.042) 116.024,82.521 ; v2@115.825,82.042 cw(c116.503,82.042) 116.024,82.521 ; 116.838,84.351 117.17,84.684 ; 117.17,82.829 118.643,82.829 ; 117.17,82.829 117.17,83.795 ; 117.17,83.795 cw(c116.351,83.795) 116.919,83.204 ccw(c116.351,83.795) 117.17,83.795 ; 117.17,83.795 117.17,84.684 ; 117.17,83.795 117.78,84.404 ; 117.78,84.404 117.78,83.337 118.529,83.337 118.643,83.223 118.643,82.829 ; 119.786,82.906 123.546,82.906 ; 123.546,82.906 124.384,82.906 124.663,82.906 ; 85.547,35.111 cw(c86.669,35.111) 85.911,35.939 ccw(c86.669,35.111) 85.547,35.111 ; 85.547,35.254 cw(c86.375,35.254) 85.925,35.949 ccw(c86.375,35.254) 85.547,35.254 ; 85.573,35.29 cw(c86.365,35.29) 85.923,35.948 ccw(c86.365,35.29) 85.573,35.29 ; 85.573,35.386 cw(c86.201,35.386) 85.937,35.956 ccw(c86.201,35.386) 85.573,35.386 ; 85.573,38.206 cw(c86.1,38.206) 85.919,38.702 ccw(c86.1,38.206) 85.573,38.206 ; v3@86.012,40.137 cw(c85.645,39.624) 86.276,39.624 ccw(c85.645,39.624) v3@86.012,40.137 ; 86.276,40.389 cw(c87.565,40.389) 86.745,41.384 ccw(c87.565,40.389) 86.276,40.389 ; 86.309,40.432 cw(c87.567,40.432) 86.748,41.386 ccw(c87.567,40.432) 86.309,40.432 ; 86.614,44.36 cw(c87.531,44.36) 87.243,45.231 ccw(c87.531,44.36) 86.614,44.36 ; v3@87.371,43.719 ccw(c86.623,44.466) 87.68,44.466 cw(c86.623,44.466) v3@87.371,43.719 ; pad.0@87.654,65.376 ccw(c88.148,65.858) 88.525,65.279 cw(c88.148,65.858) pad.0@87.654,65.376 ; pad.0@87.713,65.316 ccw(c88.14,65.732) 88.545,65.295 cw(c88.14,65.732) pad.0@87.713,65.316 ; v4@92.157,38.272 cw(c93.069,37.36) 93.069,38.65 ccw(c93.068,37.361) v4@92.157,38.272 ; v2@106.091,80.514 ccw(c106.571,80.993) 106.571,80.315 cw(c106.571,80.993) v2@106.091,80.514 ; v2@108.301,70.82 cw(c108.658,70.463) 108.658,70.968 ccw(c108.658,70.463) v2@108.301,70.82 ; v2@114.225,82.042 cw(c114.842,82.042) 114.406,82.478 ccw(c114.842,82.042) v2@114.225,82.042
  Top Layer w1.5: 105.156,71.704 105.893,70.968 108.941,70.968 ; v2@105.156,71.933 105.131,71.958 105.131,73.483 105.131,73.575 105.131,79.959 106.782,81.61 ; v11@105.297,73.29 ccw(c104.205,74.383) 105.75,74.383 ; v11@105.297,73.573 cw(c104.205,72.48) 105.75,72.48 ; v11@105.323,74.894 cw(c104.292,73.862) 105.75,73.862 ; 106.304,75.357 105.75,74.803 105.75,74.762 105.75,72.101 105.918,71.933 105.918,71.425 109.093,71.425 109.093,70.993 108.788,70.993 ; 118.285,81.407 118.407,81.407 118.75,81.153
  Bottom Layer w0.254: v1@84.231,72.208 ccw(c83.936,72.503) 84.353,72.503 ccw(c84.771,72.503) v1@84.476,72.208 ; v1(84.353,72.085) 84.353,74.752 85.649,76.048 v1(86.258,76.048) ; v1@84.612,75.184 cw(c84.195,75.184) 84.49,74.889 cw(c84.785,74.593) v1@84.785,75.011 ; v1@84.785,75.357 ccw(c84.785,75.775) 85.081,75.479 ccw(c85.376,75.184) v1@84.958,75.184 ; v1@86.136,75.925 ccw(c85.841,75.63) 85.841,76.048 ccw(c85.841,76.465) v1@86.136,76.17
  Bottom Layer w0.3: BC1.1@83.531,42.363 ccw(c83.209,42.684) 83.664,42.684 ; BC1.1@83.664,41.859 83.664,44.827 84.76,45.923 84.76,51.206 86.82,53.266 86.82,60.312 ; 83.664,43.167 ccw(c84.802,43.167) BC1.1@83.997,42.363 ; v1(90.297,95.834) 91.796,95.834 v4(92.558,96.596) ; v1@90.403,95.728 cw(c90.659,95.472) 90.659,95.834 cw(c90.659,96.196) v1@90.403,95.94 ; v4@92.308,96.596 cw(c91.704,96.596) 92.131,96.169 cw(c92.558,95.743) v4@92.558,96.346
  Bottom Layer w0.36: 99.441,65.253 103.812,65.253 105.479,66.92 v2@105.479,71.037 ; v2@105.341,71.127 cw(c105.006,70.793) 105.479,70.793 ; 105.479,70.881 cw(c105.827,70.881) v2@105.581,71.127
  Bottom Layer w0.4: SPI2.8@106.375,100.223 106.375,102.273 ; 106.375,101.327 ccw(c107.31,101.327) SPI2.8@106.649,100.666
  Bottom Layer w0.6: 94.615,41.395 94.615,46.304 ; 99.411,78.715 99.614,78.511 100.203,78.511 ; 99.805,79.434 cw(c100.584,78.655) v2@100.584,79.757 ; v2@99.838,78.945 ccw(c99.678,78.122) 99.085,78.715 99.365,78.994 ; v2(99.847,78.994) v2@99.72,78.994 ; v2@99.883,79.029 ccw(c101.133,80.28) 101.133,78.511 ; v2@99.897,79 cw(c100.879,79.111) 100.18,79.809 ; v2@100.619,79.842 ccw(c101.52,80.742) 101.52,79.469 ; 100.905,80.461 ccw(c101.559,79.807) 100.634,79.807 cw(c102.349,79.807) 101.136,81.02 ; 101.018,78.511 ccw(c101.018,79.326) v2@101.594,78.75 ; 101.215,80.64 cw(c101.95,80.64) v2@101.65,81.311 ; 101.215,80.74 cw(c101.807,80.74) v2@101.643,81.308 ; 101.277,81.16 cw(c101.629,80.808) v2@101.629,81.306 ; v2@101.58,80.045 cw(c100.922,80.133) 100.922,79.469 ; 101.63,79.469 ccw(c101.63,81.532) v2@103.089,80.074 ; v2@101.665,78.75 ccw(c102.24,79.326) 102.24,78.511 ; v2@101.665,80.074 ccw(c103.123,81.532) 103.123,79.469 ; v2@101.665,81.321 cw(c102.129,80.856) 102.129,81.513 ; v2@101.669,81.387 ccw(c102.667,82.164) 102.667,80.899 ; 101.9,80.899 ccw(c101.9,82.581) v2@103.089,81.392 ; 102.513,78.511 ccw(c102.513,79.326) v2@103.089,78.75 ; 102.624,81.513 cw(c102.624,80.856) v2@103.089,81.321 ; v2@103.159,78.75 ccw(c103.735,79.326) 103.735,78.511 ; 103.536,79.558 cw(c104.445,78.649) v2@104.445,79.935 ; 103.65,78.511 ccw(c103.65,79.586) v2@104.409,78.826 ; 104.036,81.425 cw(c104.036,80.896) v2@104.41,81.27 ; 104.127,81.954 cw(c103.478,81.305) v2@104.395,81.305 ; v2@104.421,79.941 ccw(c104.183,79.51) 103.835,79.858 103.447,79.469 100.922,79.469 ; v2@104.48,78.826 ccw(c105.232,79.567) 105.232,78.511 100.203,78.511 ; v1(112.827,88.29) 116.738,88.29 v4(117.272,87.757) ; 117.907,83.287 117.717,83.476 ; v2@118.369,83.358 cw(c118.129,83.888) 117.717,83.476 ; v2@118.425,83.277 cw(c119.859,81.842) 119.859,83.871 ; v1(120.117,86.36) 120.117,83.871 ; 120.244,83.312 120.117,83.439 120.117,83.871 ; 99.365,78.994 v2@99.72,78.994 ; 99.365,78.994 100.18,79.809 ; v2@99.72,78.994 100.203,78.511 ; 100.18,79.809 100.18,80.063 101.63,81.513 103.33,81.513 103.782,81.966 104.115,81.966 104.445,81.636 104.234,81.425 103.193,81.425 v2(103.124,81.356) 102.667,80.899 ; 100.922,79.469 v2(100.584,79.807) 100.584,80.14 101.215,80.772 101.215,80.899 102.667,80.899 ; 117.717,83.476 117.717,84.162 118.008,83.871 120.117,83.871
  Bottom Layer w0.8: v1(84.201,65.481) 85.039,64.643 ; v3(85.954,38.608) cw(c86.552,38.347) 86.552,39 ; v3@86.055,35.865 87.097,34.823 88.773,34.823 88.925,34.823 ; 86.055,39 86.552,39 ; 86.081,65.303 86.131,65.354 87.621,65.354 ccw(c87.621,63.491) v3(86.157,64.643) ; pad.0@86.537,64.937 ccw(c86.088,65.517) pad.0@86.816,65.424 ; 86.614,38.938 86.552,39 ; 86.614,63.833 87.602,63.833 v3@87.617,63.817 ; 86.624,63.516 cw(c87.751,64.643) v3(86.157,64.643) ; 87.071,63.068 86.203,63.936 ; v3(87.427,63.83) cw(c86.878,64.611) 86.203,63.936 ; 87.6,62.944 90.38,62.944 cw(c90.38,65.29) 88.511,63.87 ; pad.0@88.287,65.194 88.049,65.432 pad.0@87.6,65.432 ; pad.0@88.393,65.405 ccw(c90.242,65.405) 88.934,64.097 ; pad.0@88.472,65.365 cw(c88.075,65.907) pad.0@87.6,65.432 ; pad.0@88.6,65.399 ccw(c90.914,65.39) 89.278,63.754 ; 88.889,64.143 cw(c88.521,63.774) 89.041,63.752 ; 89.484,63.5 89.84,63.144 ; v4(92.558,96.596) 94.336,98.374 v1(95.352,98.374) 96.33,99.353 pad.0@96.33,100.032 96.33,102.845 ; 92.838,102.845 ccw(c92.838,101.37) v4(91.796,102.413) 92.227,102.845 96.33,102.845 ; 93.584,63.754 cw(c93.584,62.54) v3(94.442,63.398) cw(c95.3,62.54) 95.3,63.754 ; 94.64,42.164 94.64,43.637 ; v8@94.765,34.267 cw(c95.373,33.659) 95.373,34.519 ; v8@94.889,34.24 ccw(c94.488,34.091) 94.488,34.519 94.818,34.519 95.214,34.519 ; 95.326,63.754 89.278,63.754 ; 95.656,66.345 95.656,66.712 ; pad.0@96.143,99.166 ccw(c95.752,99.557) pad.0@96.305,99.557 ; 96.418,63.805 95.555,63.805 ccw(c95.555,65.236) v3(96.626,64.287) ; 97.18,36.297 97.333,36.449 97.333,34.9 97.18,34.747 96.952,34.519 v8(95.961,34.519) 95.214,34.519 ; SPI2.8@106.472,100.524 ccw(c105.603,101.394) 106.832,101.394 ; SPI2.8@106.473,100.526 ccw(c105.772,101.321) 106.832,101.321 ; SPI2.8@106.515,100.504 cw(c107.442,100.386) 107.442,101.321 106.832,101.321 ; v2@107.392,100.762 cw(c108.068,100.762) 107.59,101.24 ; v4@107.417,99.593 v2@107.417,100.533 ; v2@107.442,101.092 108.623,102.273 106.375,102.273 ; v2@107.491,100.771 ccw(c106.832,100.651) 106.832,101.321 ; 108.153,71.145 108.179,71.12 108.382,70.917 cw(c108.811,71.346) v2@108.371,71.764 ; 108.648,102.273 112.56,102.273 116.332,106.045 v4(119.964,106.045) ; v1@115.855,105.557 cw(c117.033,104.379) 117.033,106.045 ; pad.0@116.388,112.72 cw(c115.876,112.208) 116.6,112.208 cw(c117.324,112.208) pad.0@116.812,112.72 ; pad.0@116.6,112.932 116.6,111.924 116.919,112.243 118.593,112.243 118.999,112.649 v1(118.999,114.884) ; v4@117.17,91.345 WRC.2@120.2,91.345 ; 117.501,106.045 TY2.2@117.501,108.319 ; 118.998,112.648 ccw(c118.691,112.954) v1@119.124,112.954 ; 119.343,91.345 cw(c119.343,90.483) WRC.2@119.953,91.093 ; 119.367,91.345 ccw(c119.367,92.173) WRC.2@119.953,91.588 ; v3(86.157,64.643) ccw(c86.583,64.316) 86.203,63.936 ; pad.0@87.6,65.432 89.278,63.754 ; 95.152,63.805 ccw(c95.152,64.476) 95.656,64.033 ; 95.152,63.805 ccw(c95.152,64.476) 95.656,64.033 ; 95.152,63.805 ccw(c95.152,64.476) 95.656,64.033 ; 95.214,34.519 ccw(c95.214,33.989) 94.753,34.251 cw(c95.214,33.989) 95.214,34.519 ; 96.33,102.845 105.804,102.845 106.375,102.273 ; 106.375,102.273 106.832,101.816 106.832,101.321
  Bottom Layer w0.9: v3@81.952,35.214 cw(c82.419,34.748) 82.419,35.408 ; v3@81.988,35.229 cw(c81.988,33.931) 82.906,34.849 ; v3@82.016,35.22 cw(c81.492,34.45) 82.423,34.45 ; v3@82.018,35.219 cw(c81.52,34.575) 82.334,34.575 ; 82.841,34.913 cw(c82.319,34.392) v3@83.057,34.392 ; v3@82.985,34.347 cw(c83.524,35.408) 82.334,35.408 ; v3@82.987,34.346 cw(c83.358,35.204) 82.423,35.204 82.423,34.595 ; v3@83.005,34.342 ccw(c83.042,35.22) 83.664,34.598 ; v3@83.028,34.346 ccw(c82.562,35.378) v3@83.694,35.378 ; 83.536,34.979 ccw(c83.108,35.408) v3@83.714,35.408 ; v3@83.711,35.424 cw(c82.798,35.102) 83.483,34.417 ; pad.4@83.82,97.511 v13(85.852,95.479) ; 86.652,36.386 87.046,36.779 87.046,39.656 ; 92.903,31.09 92.954,31.14 93.505,31.691 ; 93.484,40.322 93.841,40.322 ; v4@93.558,38.166 ccw(c92.875,38.85) 93.841,38.85 ; v4@93.558,38.237 cw(c92.875,37.554) 93.841,37.554 ; 93.841,39.599 93.841,37.009 94.742,36.108 ; 94.092,36.108 94.714,35.486 96.314,35.486 96.441,35.486 97.18,34.747 95.442,34.747 ; TY.2@94.264,32.674 94.264,33.569 95.214,34.519 ; TY.2@94.294,32.944 cw(c95.875,32.944) v8@94.757,34.062 ; v8@94.898,34.203 cw(c95.961,33.14) v8@95.961,34.644 ; 95.112,35.077 95.239,34.95 ; 95.174,34.849 95.148,34.849 94.488,34.849 94.59,34.95 95.239,34.95 ; 95.711,34.747 cw(c95.711,34.268) v8@96.05,34.607 ; v8@95.873,34.607 cw(c96.211,34.268) 96.211,34.747 ; 82.334,34.684 82.334,35.408 ; 82.334,34.684 81.788,35.23 81.788,35.408 82.334,35.408 ; 82.334,34.684 82.423,34.595 ; 82.334,35.408 82.347,35.408 ; 82.347,35.408 83.156,34.598 83.664,35.106 v3(83.664,35.408) ; 82.347,35.408 v3(83.664,35.408) ; 82.423,34.595 82.601,34.417 83.483,34.417 ; 82.442,34.576 ccw(c83.007,35.141) v3@83.007,34.342 ; 82.442,34.576 ccw(c83.007,35.141) v3@83.007,34.342 ; 82.442,34.576 ccw(c83.007,35.141) v3@83.007,34.342 ; 82.442,34.576 ccw(c83.007,35.141) v3@83.007,34.342 ; 82.442,34.576 ccw(c83.007,35.141) v3@83.007,34.342 ; 83.483,34.417 83.664,34.598 ; 83.664,34.598 cw(c84.106,35.04) 83.626,35.44 ccw(c84.106,35.04) 83.664,34.598 ; 83.664,34.598 83.694,34.568 ; 83.664,34.598 83.694,34.568 ; v3(83.664,35.408) v3@83.694,35.378 ; 83.694,34.568 cw(c84.17,35.044) 83.623,35.437 ccw(c84.17,35.044) 83.694,34.568 ; 83.694,34.568 v3@83.694,35.378 ; 95.214,34.519 cw(c95.689,34.043) 96.023,34.627 ccw(c95.689,34.043) 95.214,34.519 ; 95.214,34.519 95.442,34.747 ; 95.239,34.95 95.244,34.945 95.442,34.747